# Altium PCB 智能家居-开关-主控板.PcbDoc
Units mm, origin at the board's own origin, x right, y up, seen from the top; angles counter-clockwise.
Board outline 61.77 x 59.99 mm, 2 copper layers (Top Layer, Bottom Layer); 35 components, 28 nets, 129 pads, 0 vias.
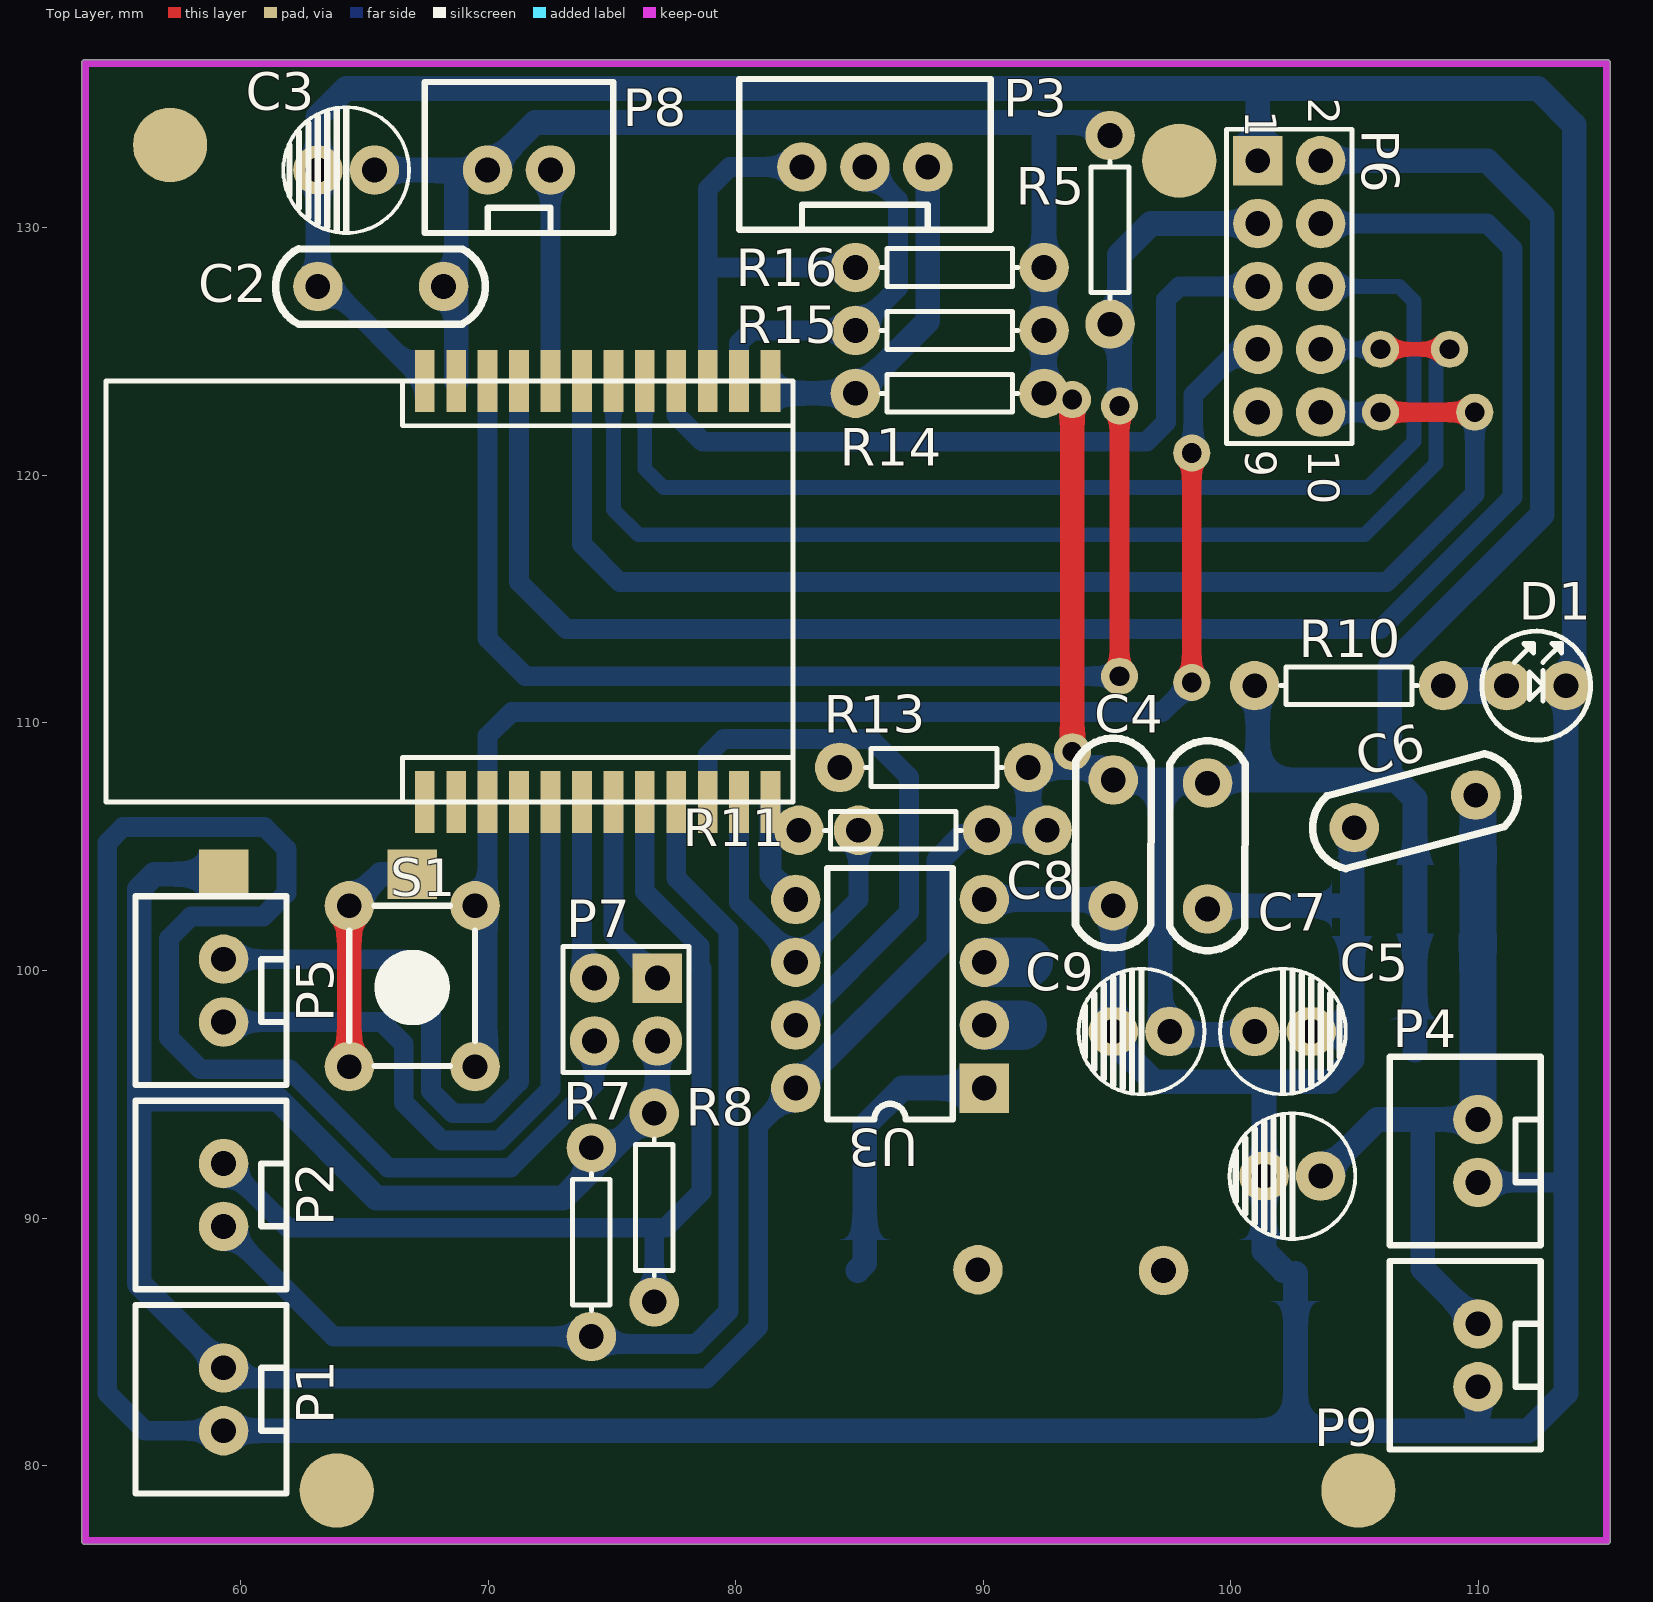
[diagram p0: Top Layer view]
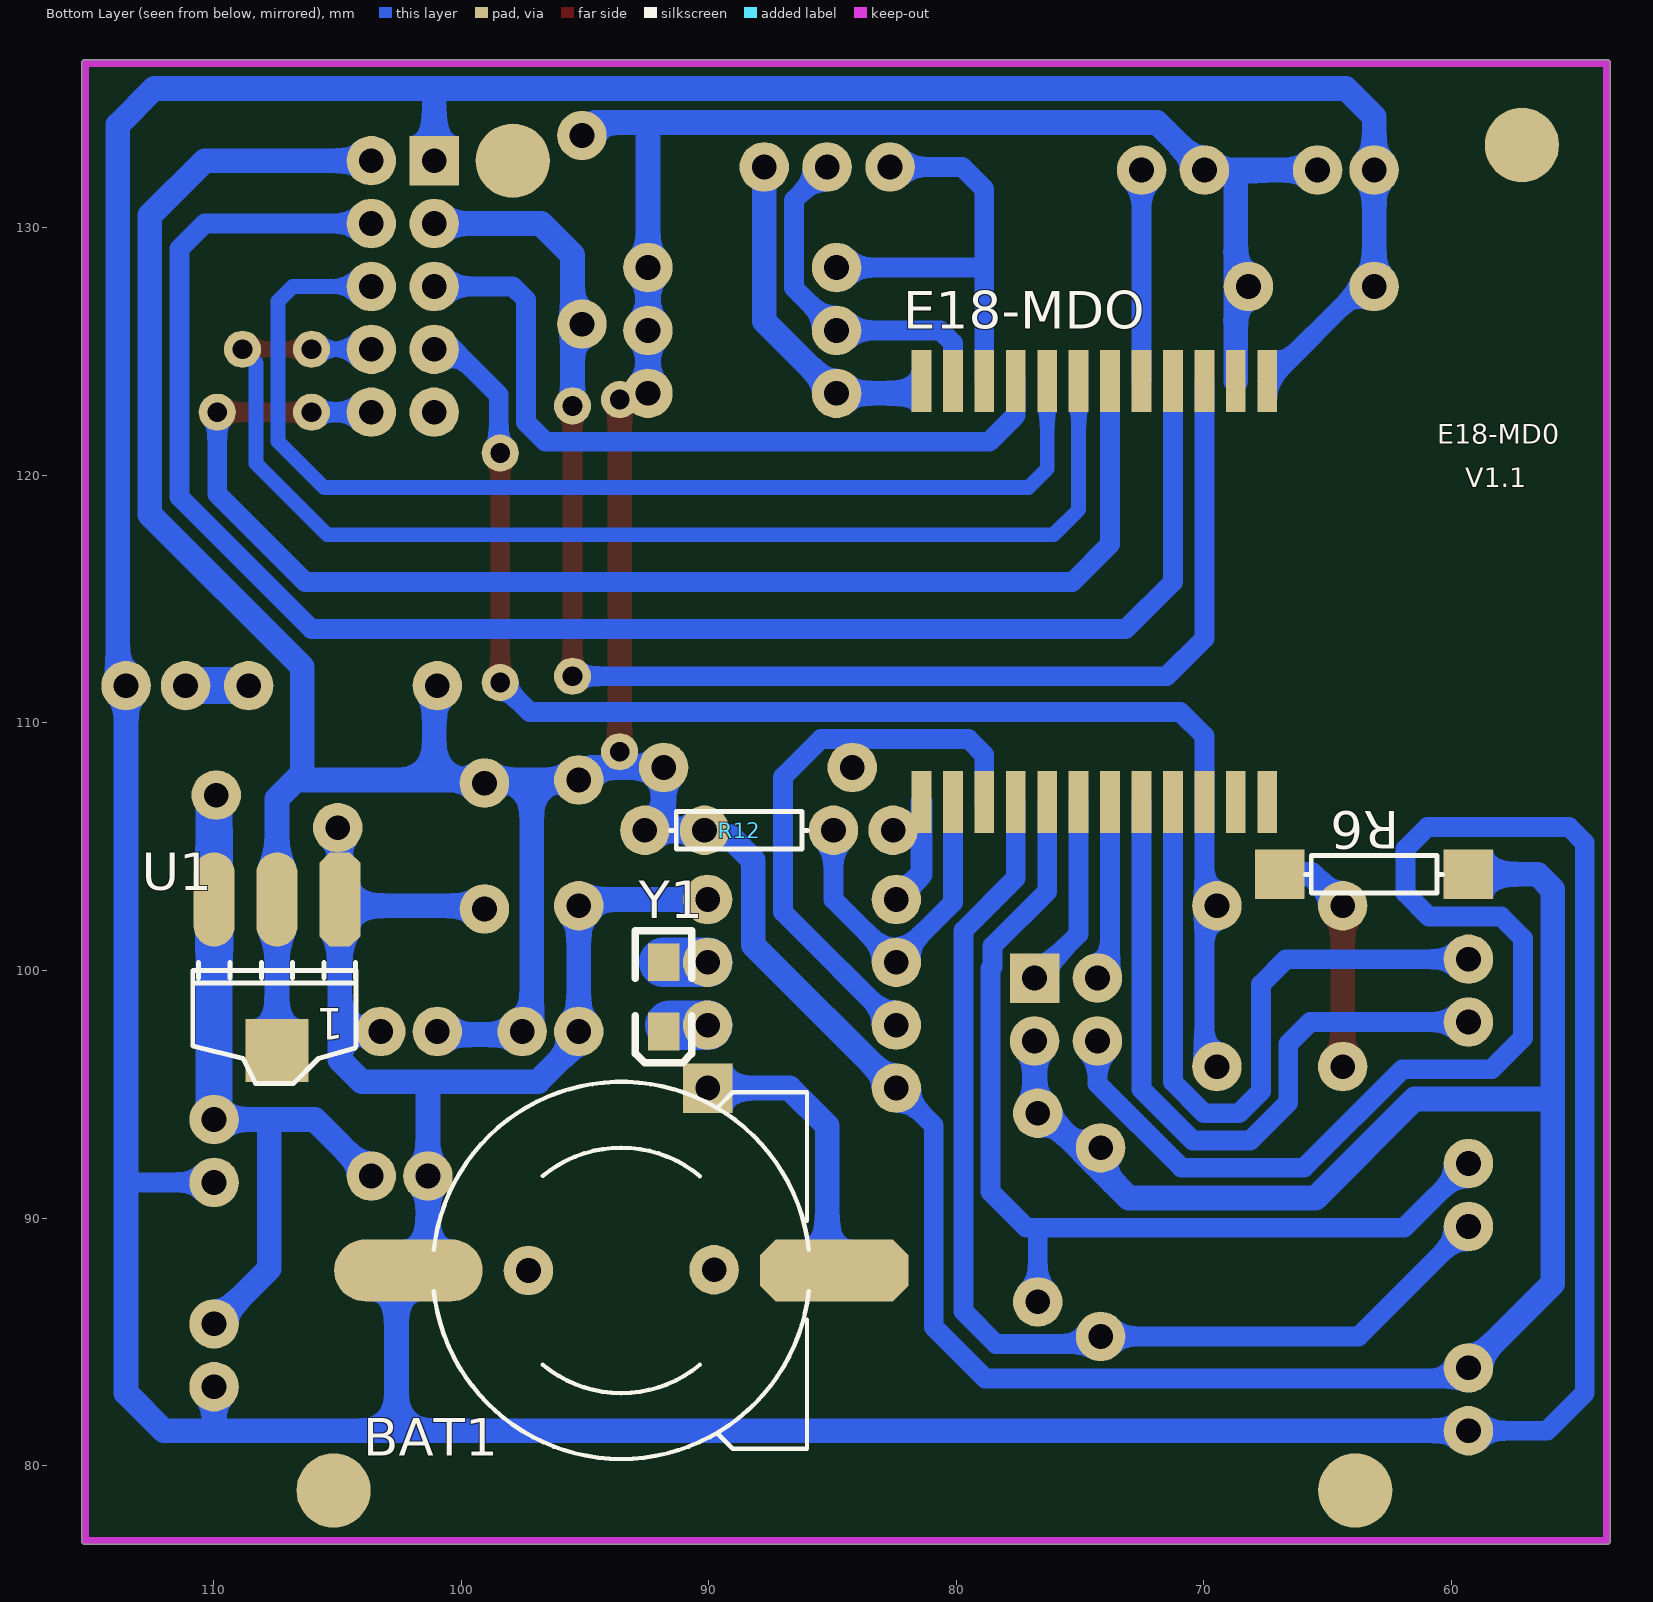
[diagram p1: Bottom Layer view, seen from below]

## Layer stack, top to bottom
Top Solder: solder mask 0.0102, Solder Resist, Dk 3.5
Top Layer: signal copper 0.0356
Dielectric 1: dielectric 0.32, FR-4, Dk 4.8
Bottom Layer: signal copper 0.0356
Bottom Solder: solder mask 0.0102, Solder Resist, Dk 3.5

## Board outline
53.721,76.812 cw(c53.721,76.962) 53.571,76.962 53.571,136.652 cw(c53.721,136.652) 53.721,136.802 115.189,136.802 cw(c115.189,136.652) 115.339,136.652 115.339,76.962 cw(c115.189,76.962) 115.189,76.812

## Design rules (kind name [scope] priority, off if disabled: settings)
Clearance [All] p1: gap=0.3
PolygonConnect [All] p1: connectstyle=Relief reliefconductorwidth=0.254 reliefentries=4 polygonreliefangle="90 Angle" airgapwidth=0.254
RoutingVias [All] p1: holewidth=1 width=2 viastyle="Through Hole" minholewidth=0.711 minwidth=1.27 maxholewidth=0.711 maxwidth=1.27
SolderMaskExpansion [All] p1: expansion=0.102
Width [All] p1: maxlimit=5 minlimit=0.5 preferedwidth=0.8 minimp=50.000000 maximp=50.000000 favimp=50.000000
30 further rules are at their usual default settings.

## Components (designator, comment, footprint, x,y, rotation, side; value= is the part's Value field where it differs from the comment)
BAT1 "BATT" BATM 93.534,87.884 r90 bottom
C2 "0.01uF" 0.1UF 65.659,127.635 r180 top
C3 "Cap Pol1" CD5 65.405,132.334 r270 top
C4 "Cap Pol1" CD5 100.965,97.536 r90 top
C5 "Cap Pol1" CD5 103.632,91.694 r270 top
C6 "0.01uF" 0.1UF 107.442,106.426 r15 top
C7 "0.01uF" 0.1UF 99.06,105.029 r90 top
C8 "0.01uF" 0.1UF 95.25,105.156 r270 top
C9 "Cap Pol1" CD5 97.536,97.536 r270 top
D1 "LED0" LED-3 111.138,111.506 r0 top
E18-MDO "Zigbee" E18-MD0-1 81.407,122.907 r180 bottom
P1 "按键板电源接口" DG1282 68.453,78.867 r90 top
P2 "按键控制接口" DG1282 68.453,87.122 r90 top
P3 "功率测量通讯端口" DG1283 80.137,136.017 r0 top
P4 "主控板电源接口" DG1282 119.126,88.9 r90 top
P5 "状态指示灯接口" DG1282 68.453,95.377 r90 top
P6 "程序下载接口" HDR2X5 101.092,132.715 r270 top
P7 "调试接口" HDR2X2 76.835,99.695 r180 top
P8 "双向晶闸管控制接口" DG1282 67.437,123.19 r0 top
P9 "功率测量器电源端口" DG1282 119.126,80.645 r90 top
R5 "4.7K" AXIAL-0.3#1 95.123,129.921 r270 top
R6 "4.7K" AXIAL-0.3#2 63.119,103.886 r0 bottom
R7 "4.7K" AXIAL-0.3#1 74.168,89.027 r270 top
R8 "4.7K" AXIAL-0.3#1 76.708,90.424 r270 top
R10 "Res1" AXIAL-0.3#1 104.775,111.506 r0 top
R11 "10K" AXIAL-0.3#1 86.36,105.664 r0 top
R12 "10K" AXIAL-0.3#1 88.773,105.664 r0 bottom
R13 "10K" AXIAL-0.3#1 88.011,108.204 r0 top
R14 "10K" AXIAL-0.3#1 88.646,123.317 r0 top
R15 "10K" AXIAL-0.3#1 88.646,125.857 r0 top
R16 "10K" AXIAL-0.3#1 88.646,128.397 r0 top
S1 "SW-PB" KEY_M 69.469,102.616 r270 top
U1 "AMS1117-3.3" AMS1117 104.901,102.868 r0 bottom
U3 "DS1302" DIP-8N 90.043,95.25 r180 top
Y1 "32KHz" 3216 91.821,100.33 r270 bottom

## Footprints (in the part's own frame and the unit in brackets; to place one, negate y for a bottom-side part, rotate by r counter-clockwise, add the part's x,y. Pads: shape width x height; smd on the part's side, far side on the other; paste and mask are expansions set on the pad)
0.1UF [mm]
  round 2 hole 1: 1(-2.54,0) 2(2.54,0)
  silkscreen extent -4.22,-1.52 4.25,1.53
3216 [mil]
  rect 60x50 smd: 1(0,0) 2(110,0)
  silkscreen extent -50,-45 160,45
AMS1117 [mil]
  oct 65x150 smd: 1(0.03,-0.06)
  oval 65x150 smd: 2(100.03,-0.06) 3(200.03,-0.06)
  rect 100x100 smd: 4(100.03,239.94)
  silkscreen extent -26,100 234,293
AXIAL-0.3#1 [mm] "Axial Device, Thru-Hole; 2 Leads; 0.3 in Pin Spacing"
  round 2 hole 1: 1(-3.81,0) 2(3.81,0)
  silkscreen extent -2.77,-0.76 2.77,0.76
AXIAL-0.3#2 [mm] "Axial Device, Thru-Hole; 2 Leads; 0.3 in Pin Spacing"
  rect 2x2 all layers, no hole: 1(-3.81,0) 2(3.81,0)
  silkscreen extent -2.77,-0.76 2.77,0.76
BATM [mm]
  round 2 hole 1 unplated: 0(0,3.748) 0(0.025,-3.752)
  oct 2.5x6 smd: 1(0,-8.602)
  oval 2.5x6 smd: 2(0,8.598)
  silkscreen extent -7.62,-7.58 7.62,7.57
CD5 [mm]
  round 2 hole 1: 1(0,0) 2(0,-2.286)
  silkscreen extent -2.54,-3.68 2.54,1.4
DG1282 [mm]
  round 2 hole 1: 1(2.54,9.144) 2(5.08,9.144)
  silkscreen extent 0,6.6 7.62,12.7
DG1283 [mm]
  round 2 hole 1: 1(2.54,-3.556) 2(5.08,-3.556) 3(7.62,-3.556)
  silkscreen extent 0,-6.1 10.16,0
DIP-8N [mm]
  rect 2x2 hole 1: 1(0,0)
  round 2 hole 1: 2(0,-2.54) 3(0,-5.08) 4(0,-7.62) 5(7.62,-7.62) 6(7.62,-5.08) 7(7.62,-2.54) 8(7.62,0)
  silkscreen extent 1.27,-8.89 6.35,1.27
E18-MD0-1 [mm] "Connector; Header; 8 Position"
  rect 0.8x2.5 all layers, no hole: 1(13.97,0.9) 2(12.7,0.9) 3(11.43,0.9) 4(10.16,0.9) 5(8.89,0.9) 6(7.62,0.9) 7(6.35,0.9) 8(5.08,0.9) 9(3.81,0.9) 10(2.54,0.9) 11(1.27,0.9) 12(0,0.9) 13(0,-16.1) 14(1.27,-16.1) 15(2.54,-16.1) 16(3.81,-16.1) 17(5.08,-16.1) 18(6.35,-16.1) 19(7.62,-16.1) 20(8.89,-16.1) 21(10.16,-16.1) 22(11.43,-16.1) 23(12.7,-16.1) 24(13.97,-16.1)
  Top Layer lines w0.22: 0.14,-15.52 cw(c0.116,-15.496) 0.116,-15.53 0.11,-15.53
HDR2X2 [mm]
  rect 2x2 hole 1: 1(0,0)
  round 2 hole 1: 2(0,2.54) 3(2.54,0) 4(2.54,2.54)
  silkscreen extent -1.27,-1.27 3.81,3.81
HDR2X5 [mm] "Connector; Header; 5x2 Position"
  rect 2x2 hole 1: 1(0,0)
  round 2 hole 1: 2(0,2.54) 3(2.54,0) 4(2.54,2.54) 5(5.08,0) 6(5.08,2.54) 7(7.62,0) 8(7.62,2.54) 9(10.16,0) 10(10.16,2.54)
  silkscreen extent -1.27,-1.27 11.43,3.81
KEY_M [mm]
  round 2 hole 1: 1(0,0) 1(6.5,0) 2(0,-5.08) 2(6.5,-5.08)
  silkscreen extent 0,-5.08 6.48,0
LED-3 [mm]
  round 2 hole 1: 1(0,0) 2(2.4,0)
  silkscreen extent -1,-2.2 3.4,2.2

## Part data
BAT1: library part BAT
C2 C6 C7 C8: library part C
C3 C4 C5 C9: "Polarized Capacitor (Radial)"
D1: "Typical INFRARED GaAs LED"
E18-MDO: library part E18-MDO, "Zigbee模块"
P1 P2 P4 P5 P8 P9: library part "Header 2H", "Header, 2-Pin, Right Angle"
P3: library part "Header 3", "Header, 3-Pin"
P6: library part "Header 5X2", "Header, 5-Pin, Dual row"
P7: library part "Header 2X2H", "Header, 2-Pin, Dual row, Right Angle"
R5 R6 R7 R8 R11 R12 R13 R14 R15 R16: library part R
R10: "Resistor"
S1: "Switch"
U1: library part AMS1117
Y1: library part XTAL, "Crystal Oscillator"

## Free pads (board coordinates)
  round 3 all layers, no hole: 7(57.15,133.35) 7(63.881,78.994) 7(97.917,132.715) 7(105.156,78.994)
  round 1.5 hole 0.8: 9(93.599,108.839) 9(93.599,123.063) 9(95.504,111.887) 9(95.504,122.809) 9(98.425,111.633) 9(98.425,120.904) 9(106.045,122.555) 9(106.045,125.095) 9(108.839,125.095) 9(109.855,122.555)

## Nets (pads, with @x,y where several pads share a name; then routed paths per layer and width w, separated by ;. In a path a pad name is that pad's centre, name@x,y a point inside that pad or via, vN(x,y) a via of type N, cw(c..) or ccw(c..) an arc to the next point about the centre after c; other vN are vias at no path point)
CF: E18-MDO.12 P3.3 R14.1 | length 14.4
  Bottom Layer w1: E18-MDO.12@81.661,123.317 84.346,123.317 84.836,123.807 R14.1@85.332,123.807 ; R14.1 84.842,123.317 R14.1@85.332,123.807 ; P3.3@87.757,132.588 P3.3 87.757,126.232 R14.1@85.332,123.807
CF1: E18-MDO.11 P3.2 R15.1 | length 14.3
  Bottom Layer w0.8: E18-MDO.11 80.137,125.349 80.645,125.857 R15.1 86.557,127.578 86.557,131.121 P3.2
DBG_CSN: E18-MDO.9 P6.5 | length 30.8
  Bottom Layer w0.8: E18-MDO.9 77.597,122.428 78.666,121.359 96.594,121.359 97.382,122.147 97.382,127.1 97.917,127.635 P6.5
DBG_DC: E18-MDO.3 P6.3 pad.9@95.504,111.887 pad.9@95.504,122.809 R5.2 | length 59.7
  Top Layer w0.8: pad.9@95.504,111.887 pad.9@95.504,122.809
  Bottom Layer w0.8: E18-MDO.3 69.977,113.411 71.501,111.887 pad.9@95.504,111.887
  Bottom Layer w1: pad.9@95.504,122.809 95.504,128.905 96.774,130.175 P6.3
DBG_DIO: E18-MDO.4 P6.4 | length 69.4
  Bottom Layer w0.8: E18-MDO.4 71.247,115.697 73.152,113.792 106.045,113.792 111.379,119.126 111.379,129.159 110.363,130.175 P6.4
DBG_MISO: E18-MDO.6 P6.10 pad.9@106.045,122.555 pad.9@109.855,122.555 | length 54.3
  Top Layer w0.8: pad.9@106.045,122.555 pad.9@109.855,122.555
  Bottom Layer w0.8: E18-MDO.6 73.787,117.221 75.311,115.697 106.299,115.697 109.855,119.253 pad.9@109.855,122.555 ; P6.10 pad.9@106.045,122.555
DBG_MOSI: E18-MDO.7 P6.8 pad.9@106.045,125.095 pad.9@108.839,125.095 | length 50.1
  Top Layer w0.6: pad.9@106.045,125.095 pad.9@108.839,125.095
  Bottom Layer w0.6: E18-MDO.7 75.057,118.618 76.073,117.602 105.41,117.602 108.295,120.487 108.295,124.551 pad.9@108.839,125.095 ; P6.8 pad.9@106.045,125.095
DBG_SCK: E18-MDO.8 P6.6 | length 45.4
  Bottom Layer w0.6: E18-MDO.8 76.327,120.269 77.089,119.507 105.537,119.507 107.395,121.365 107.395,127.047 106.807,127.635 P6.6
GND: BAT1.2 C2.2 C3.2 C4.2 C5.2 C6.1 C7.1 C8.2 C9.2 D1.2 E18-MDO.1 P1.1 P4.1 P6.1 P7.4 P9.1 U1.1 U3.4 | length 300.3
  Bottom Layer w0.8: P1.1 56.134,81.407 54.61,82.931 54.61,105.156 55.245,105.791 60.96,105.791 61.849,104.902 61.849,103.124 60.911,102.186 57.99,102.186 57.101,101.297 57.101,97.282 58.371,96.012 61.976,96.012 65.954,92.034 70.902,92.034 74.295,95.427 P7.4 ; C2.2 63.609,127.635 E18-MDO.1 ; 109.855,81.407 109.982,81.534 ; P4.1 113.538,91.44
  Bottom Layer w1: P1.1 102.616,81.407 ; C2.2 C3.2 63.119,134.493 64.262,135.636 100.965,135.636 ; U3.4 C8.2@94.742,102.87 ; C8.2 C9.2 95.25,97.155 96.901,95.504 101.473,95.504 ; C7.1@99.187,102.616 U1.1@104.902,102.616 ; P6.1 101.092,135.509 100.965,135.636 ; BAT1.2 101.346,88.67 C5.2 101.346,95.377 101.473,95.504 ; BAT1.2@102.616,87.757 102.616,81.407 ; C4.2 104.902,97.536 ; C6.1@104.567,105.746 104.902,105.411 U1.1 U1.1@104.902,102.616 ; 109.982,81.534 P9.1 ; D1.2 113.538,91.44 113.538,82.931 112.014,81.407 109.855,81.407 102.616,81.407 ; D1.2@113.879,111.506 113.879,134.152 112.395,135.636 100.965,135.636 ; 101.473,95.504 104.013,95.504 104.902,96.393 104.902,97.536 ; 104.902,97.536 U1.1@104.902,102.616
KEY1: E18-MDO.17 P2.2 R8.2 | length 40.7
  Bottom Layer w0.8: P2.2 61.906,89.605 76.581,89.605 ; E18-MDO.17 76.327,103.193 78.535,100.985 78.535,100.154 78.613,100.076 78.613,91.059 77.159,89.605 76.581,89.605 ; R8.2 76.708,89.478 76.581,89.605
KEY2: E18-MDO.16 P2.1 R7.2 | length 44.2
  Bottom Layer w0.8: P2.1 63.754,85.217 R7.2 ; R7.2@74.168,84.914 78.394,84.914 79.713,86.233 79.713,101.62 77.597,103.736 E18-MDO.16
LED1: E18-MDO.21 P5.2 | length 28.9
  Bottom Layer w0.8: P5.2 66.675,100.457 67.691,99.441 67.691,95.123 68.58,94.234 69.991,94.234 71.247,95.49 E18-MDO.21
LED2: E18-MDO.20 P5.1 | length 29
  Bottom Layer w0.8: P5.1 65.702,97.917 66.591,97.028 66.591,94.667 68.124,93.134 70.447,93.134 72.517,95.204 E18-MDO.20
NetBAT1_1: BAT1.1 U3.1 | length 11.4
  Bottom Layer w1: BAT1.1 85.217,88.169 85.217,93.726 86.741,95.25 U3.1
NetD1_1: D1.1 R10.2 | length 2.6
  Bottom Layer w1.5: R10.2 D1.1
NetR6_2: R6.2 S1.2 | length 9.6
  Top Layer w1: S1.2@64.389,96.116 S1.2@64.389,102.616
  Bottom Layer w1: S1.2@64.389,102.616 65.659,103.886 R6.2
NetU3_2: U3.2 Y1.2 | length 1.9
  Bottom Layer w1: Y1.2@91.567,97.79 Y1.2
  Bottom Layer w2: U3.2 Y1.2@91.567,97.79
NetU3_3: U3.3 Y1.1 | length 1.8
  Bottom Layer w2: U3.3 Y1.1
P0.2: E18-MDO.19 P7.3 | length 7.3
  Bottom Layer w0.8: E18-MDO.19 73.787,100.203 P7.3
P0.3: E18-MDO.18 P7.1 | length 7.8
  Bottom Layer w0.8: E18-MDO.18 75.057,101.473 P7.1
P0.6: E18-MDO.15 R13.1 U3.7 | length 24.5
  Bottom Layer w0.8: E18-MDO.15 78.867,108.712 79.502,109.347 84.709,109.347 ; U3.7 87.001,102.368 87.001,107.817 85.471,109.347 84.709,109.347 ; R13.1@84.455,107.823 84.455,109.093 84.709,109.347
P0.7: E18-MDO.14 R12.1 U3.6 | length 13.8
  Bottom Layer w0.8: E18-MDO.14 80.137,102.752 82.423,100.466 U3.6 84.963,102.87 R12.1
P1.0: E18-MDO.13 R11.1 U3.5 | length 4.4
  Bottom Layer w0.9: E18-MDO.13 81.407,103.886 U3.5
P1.3: E18-MDO.10 P3.1 R16.1 | length 18
  Bottom Layer w0.8: E18-MDO.10 78.867,128.27 ; P3.1 79.756,132.461 78.867,131.572 78.867,128.27 ; R16.1 78.994,128.397 78.867,128.27
P2.0: E18-MDO.5 P8.2 | length 8.5
  Bottom Layer w0.8: E18-MDO.5 P8.2
RST: E18-MDO.22 P6.7 pad.9@98.425,111.633 pad.9@98.425,120.904 S1.1 | length 57.9
  Top Layer w0.8: pad.9@98.425,111.633 pad.9@98.425,120.904
  Bottom Layer w0.8: S1.1@69.469,96.116 69.977,96.624 E18-MDO.22 69.977,109.474 70.95,110.447 92.837,110.447 92.847,110.437 97.229,110.437 pad.9@98.425,111.633 ; pad.9@98.425,120.904 98.482,120.961 98.482,123.247 100.33,125.095 P6.7
VCC-3.3: C2.1 C3.1 C4.1 C7.2 C8.1 C9.1 E18-MDO.2 P1.2 P6.2 P7.2 P8.1 pad.9@93.599,108.839 pad.9@93.599,123.063 R5.1 R6.1 R7.1 R8.1 R10.1 R11.2 R12.2 R13.2 R14.2 R15.2 R16.2 U1.2 U1.4 U3.8 | length 246.1
  Top Layer w1: pad.9@93.599,108.839 pad.9@93.599,123.063
  Bottom Layer w0.8: P1.2 59.739,83.517 78.832,83.517 80.913,85.598 80.913,93.74 U3.8
  Bottom Layer w1: P1.2 55.901,87.355 55.901,94.869 ; R6.1 56.515,103.886 55.901,103.272 55.901,94.869 ; C3.1 68.453,132.334 ; E18-MDO.2 68.707,132.08 68.453,132.334 ; P7.2 76.835,94.615 73.025,90.805 65.486,90.805 61.479,94.812 55.958,94.812 55.901,94.869 ; U3.8 82.429,95.25 88.201,101.022 88.201,104.457 89.154,105.41 R11.2@90.17,105.41 ; R11.2 91.821,105.664 R13.2 94.742,108.204 C8.1 97.155,107.696 ; R14.2 R15.2 R16.2 92.456,134.134 92.329,134.261 ; R5.1 94.593,134.261 92.329,134.261 ; R10.1@101.092,110.871 101.092,107.696 ; C4.1@101.346,97.409 97.155,97.409 97.155,107.696 ; P6.2 110.363,132.715 112.579,130.499 112.579,118.421 106.426,112.268 106.426,107.95 106.68,107.696 ; U1.4 U1.2 107.442,106.934 106.68,107.696 ; 68.453,132.334 P8.1 69.977,132.34 71.898,134.261 92.329,134.261 ; 97.155,107.696 101.092,107.696 ; 101.092,107.696 106.68,107.696
VCC-5: C5.1 C6.2 P4.2 P9.2 U1.3 | length 29.1
  Bottom Layer w1: C5.1 105.918,93.98 107.823,93.98 ; P9.2 107.759,87.947 107.759,93.916 107.823,93.98 ; P4.2 107.823,93.98
  Bottom Layer w1.5: P4.2 U1.3 C6.2@109.982,106.553
pads on no net: BAT1.0 E18-MDO.23 E18-MDO.24 P6.9

## Keep-outs
Keep-Out Layer:
  lines w0.3: 53.721,76.962 53.721,136.652 115.189,136.652 115.189,76.962 53.721,76.962

## Silkscreen, mask and mechanical layers (free items; w line width, h text height)
Drill Drawing:
  text ".LEGEND" at 120.118,81.153 h1.52
  text "Drill Drawing." at 120.88,78.74 h1.52

## Dimensions
53.721,76.962 to 53.721,136.652 on Mechanical 1
53.721,76.962 to 115.316,74.295 on Mechanical 1

## Text inside footprints (layer, text, board x,y; h text height)
E18-MDO: Bottom Overlay "E18-MD0" at 60.567,121.287 h0.8; Bottom Overlay "V1.1" at 59.437,119.517 h0.8
P6: Top Overlay "2" at 103.124,135.255 h1.27 r270; Top Overlay "1" at 100.584,134.747 h1.27 r270; Top Overlay "9" at 100.584,121.031 h1.27 r270; Top Overlay "10" at 103.124,121.031 h1.27 r270
U1: Bottom Overlay "1" at 104.75,98.476 h1.27 r180